# Altium PCB ArduinoUnoShield.PcbDoc
Units mil, origin at the board's own origin, x right, y up, seen from the top; angles counter-clockwise.
Board outline 2700 x 2100 mil, 2 copper layers (Top Layer, Bottom Layer); 5 components, 32 nets, 42 pads, 0 vias.
Unrouted connection lines stored in the file: 5.
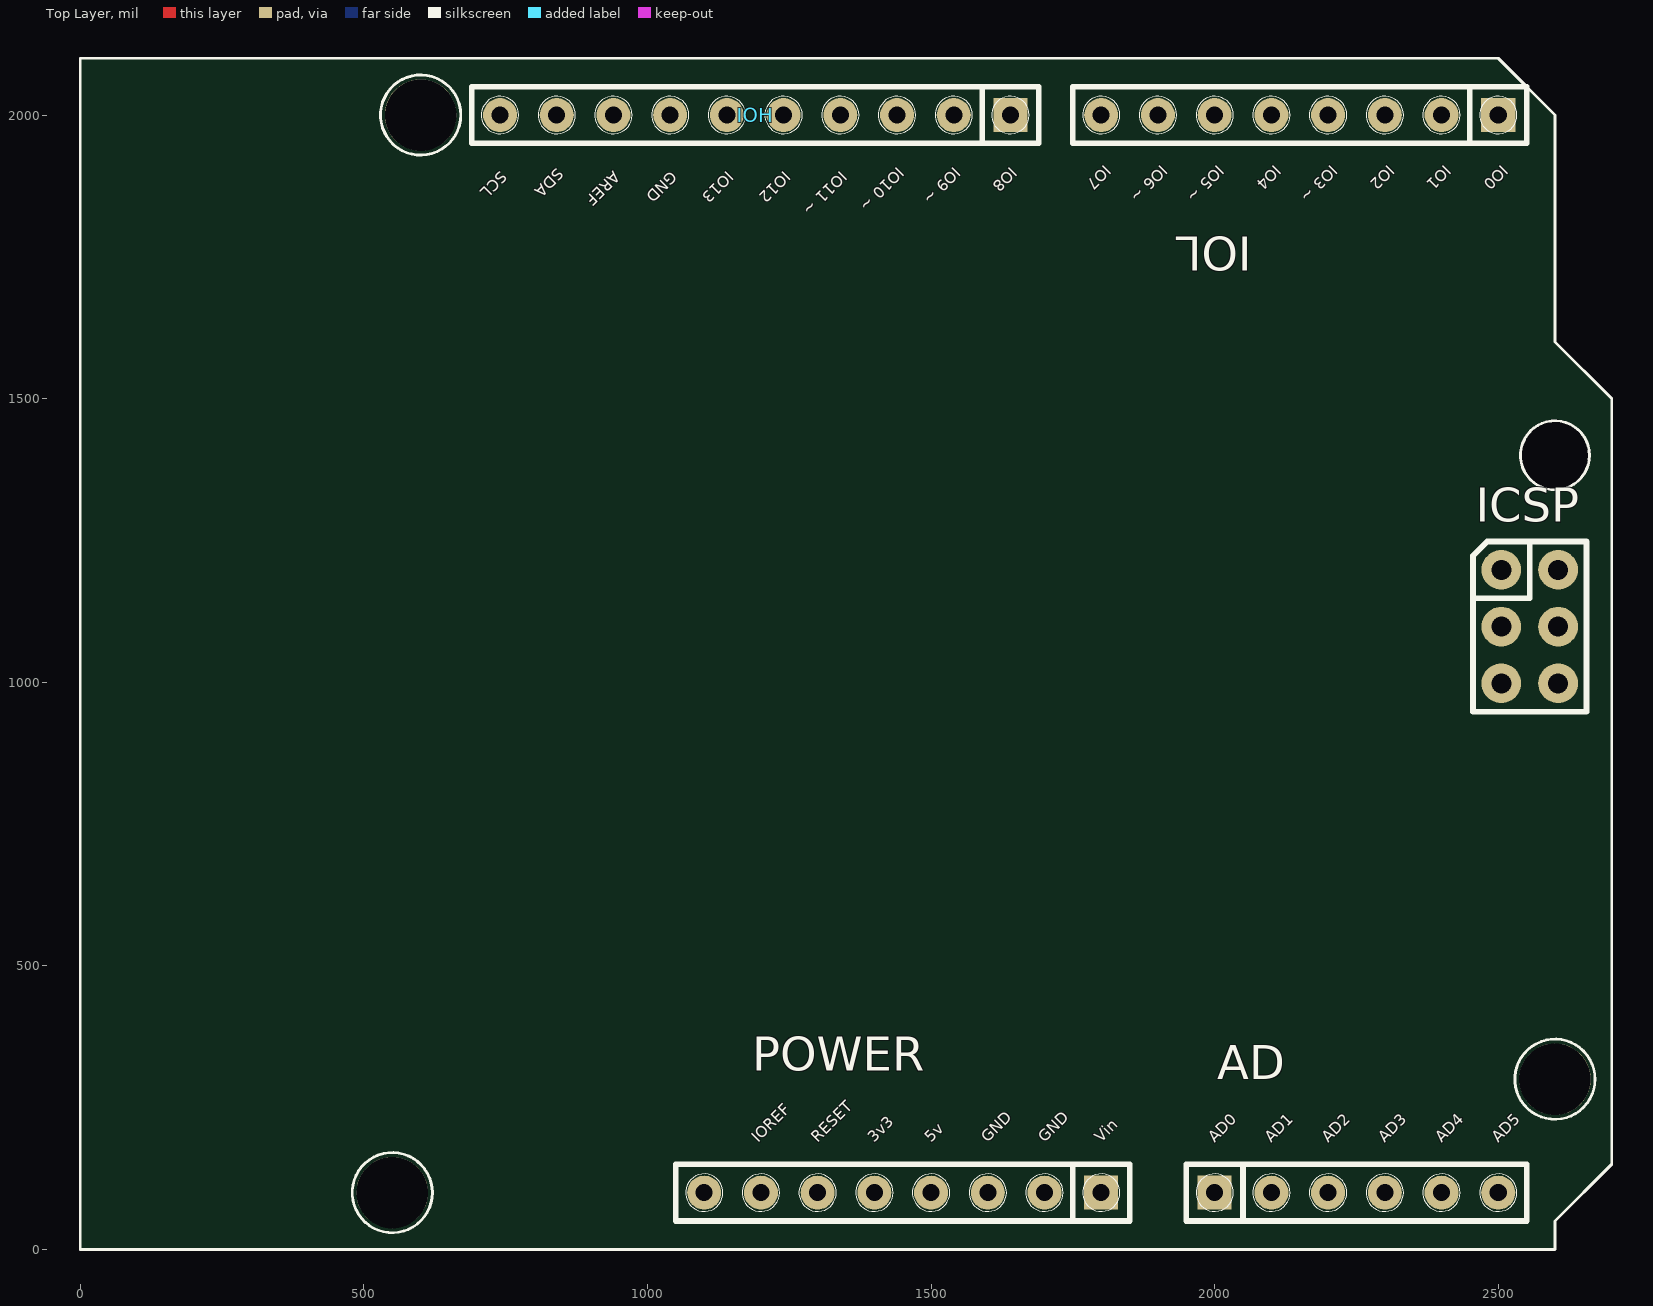
[diagram p0: Top Layer view]
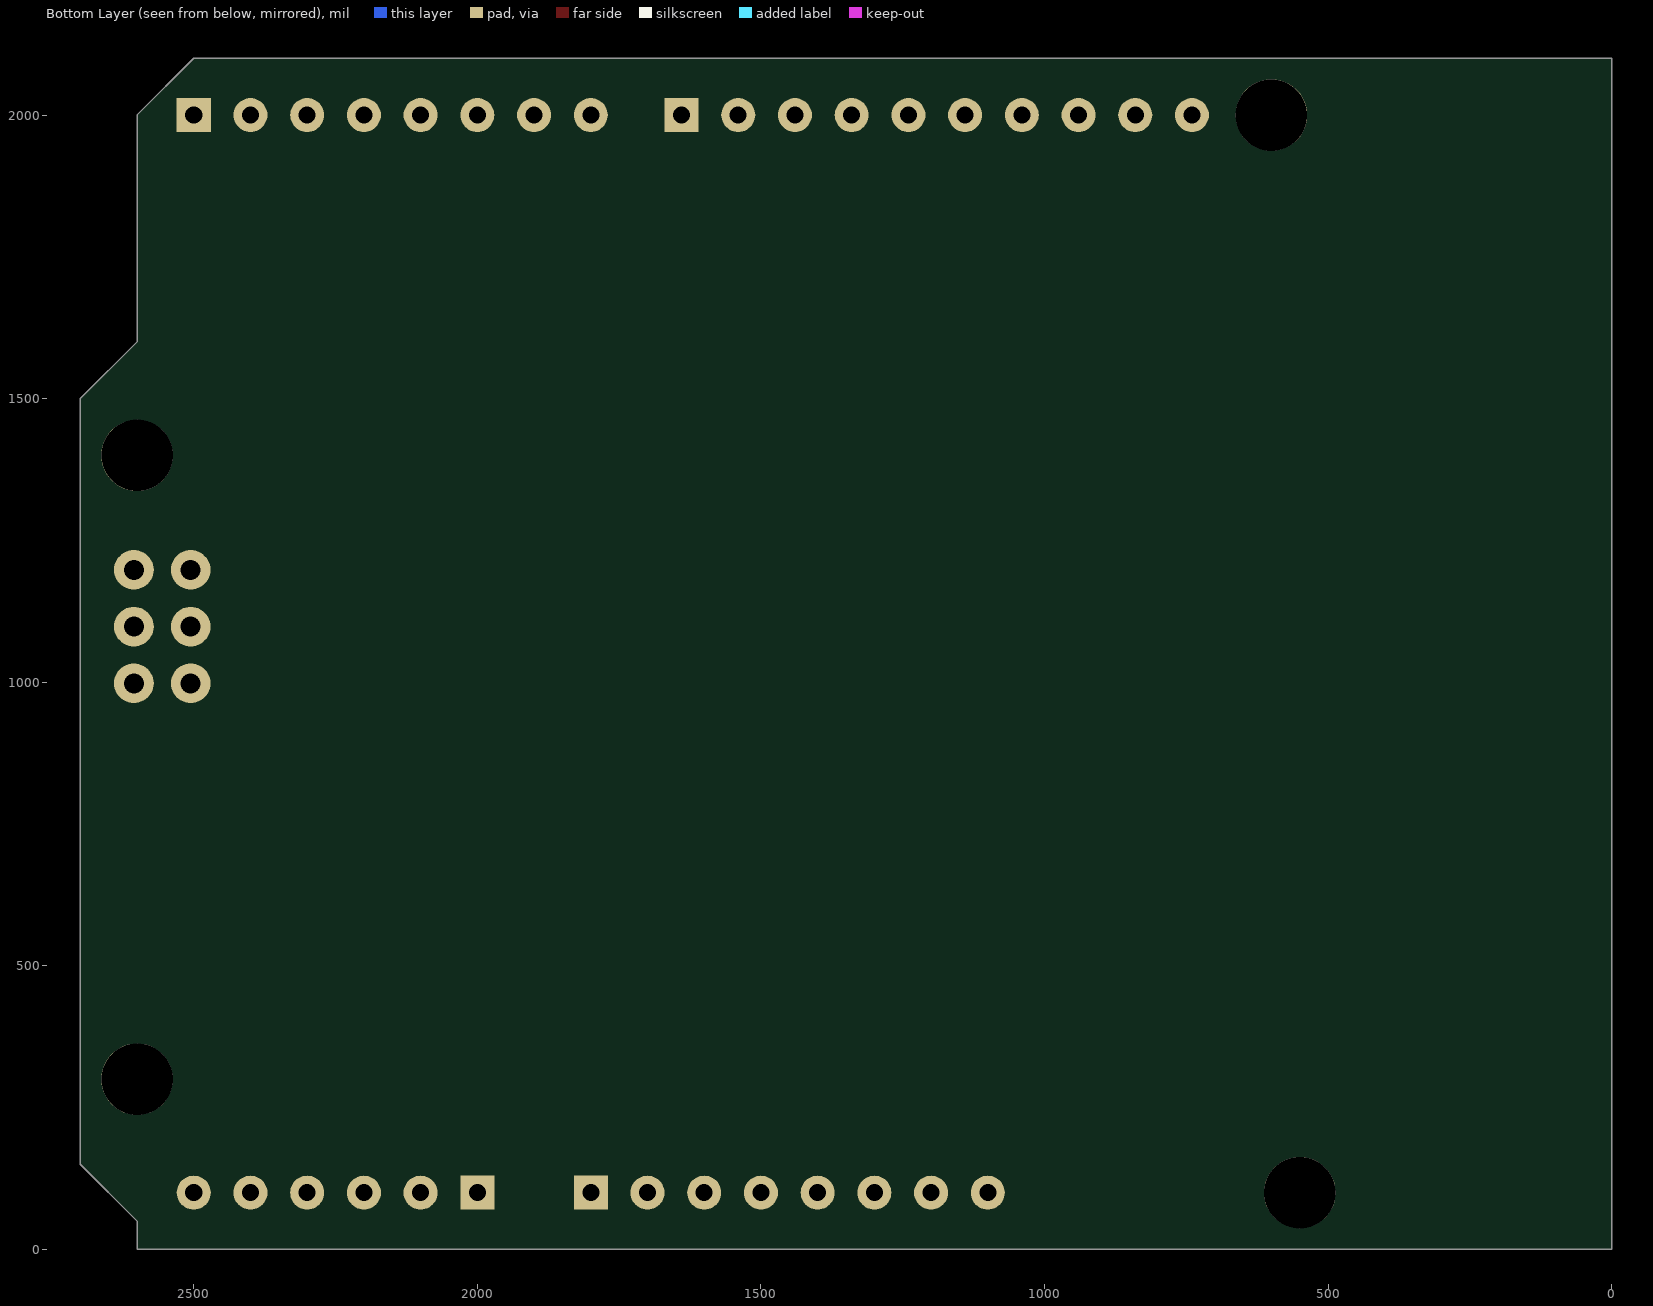
[diagram p1: Bottom Layer view, seen from below]

## Layer stack, top to bottom
Top Solder: solder mask 0.4, Solder Resist, Dk 3.5
Top Layer: signal copper 1.4
Dielectric1: dielectric 12.6, FR-4, Dk 4.8
Bottom Layer: signal copper 1.4
Bottom Solder: solder mask 0.4, Solder Resist, Dk 3.5

## Board outline
0,0 0,2100 2500,2100 2600,2000 2600,1600 2700,1500 2700,150 2600,50 2600,0

## Design rules (kind name [scope] priority, off if disabled: settings)
Clearance [All] p1: gap=10 ignorepadtopadclearanceinfootprint=FALSE except(0: Arc-Hole Track-Hole SMDPad-Hole THPad-Hole Via-Hole Fill-Hole Poly-Hole Region-Hole Text-Hole)
PolygonConnect [All] p1: connectstyle=Relief reliefconductorwidth=10 reliefentries=4 polygonreliefangle="90 Angle" airgapwidth=10
RoomDefinition ArduinoUnoShield [InComponentClass('ArduinoUnoShield')] p1: confinementstyle=ConfineOut formatcopy=TRUE lockcomponents=FALSE outline 2900,-40 3490,-40 3490,425 2900,425
RoutingVias [All] p1: holewidth=28 width=50 viastyle="Through Hole" minholewidth=28 minwidth=50 maxholewidth=28 maxwidth=50
SilkToSolderMaskClearance SilkscreenOverComponentPads [IsPad] p1: minsilkscreentomaskgap=10 clearancetoexposedcopper=TRUE
SolderMaskExpansion [All] p1: expansion=4
Width [All] p1: maxlimit=10 minlimit=10 preferedwidth=10
29 further rules are at their usual default settings.

## Components (designator, comment, footprint, x,y, rotation, side; value= is the part's Value field where it differs from the comment)
AD "AD" "Header 6x1 8.5mm" 2000,100 r0 top locked
ICSP "ICSP" ICSP 2505.51,1198.03 r0 top locked
IOH "IOH" "Header 10x1 8.5mm" 1640,2000 r180 top locked
IOL "IOL" "Header 8x1 8.5mm" 2500,2000 r180 top locked
POWER "POWER_UNO" "Header 8x1 8.5mm" 1800,100 r180 top locked

## Footprints (in the part's own frame and the unit in brackets; to place one, negate y for a bottom-side part, rotate by r counter-clockwise, add the part's x,y. Pads: shape width x height; smd on the part's side, far side on the other; paste and mask are expansions set on the pad)
"Header 6x1 8.5mm" [mil] "Stackable 6 pin header"
  rect 60x60 hole 30: 1(0,0)
  round 60 hole 30: 2(100,0) 3(200,0) 4(300,0) 5(400,0) 6(500,0)
  silkscreen extent -50,-50 550,50, body extent -50,-50 550,50, height 335
"Header 8x1 8.5mm" [mil] "Stackable 8 pin header"
  rect 60x60 hole 30: 1(0,0)
  round 60 hole 30: 2(100,0) 3(200,0) 4(300,0) 5(400,0) 6(500,0) 7(600,0) 8(700,0)
  silkscreen extent -50,-50 750,50, body extent -50,-50 750,50, height 335
"Header 10x1 8.5mm" [mil] "Stackable 10 pin header"
  rect 60x60 hole 30: 1(0,0)
  round 60 hole 30: 2(100,0) 3(200,0) 4(300,0) 5(400,0) 6(500,0) 7(600,0) 8(700,0) 9(800,0) 10(900,0)
  silkscreen extent -50,-50 950,50, body extent -50,-50 950,50, height 335
ICSP [mil]
  round 70 hole 35.43: 1(0,0) 2(100,0) 3(0,-100) 4(100,-100) 5(0,-200) 6(100,-200)
  silkscreen extent -50,-250 150,50, body extent -50,-250 150,50, height 485

## Free pads (board coordinates)
  round 125.98 hole 125.98: 0(550,100) 0(600,2000) 0(2600,300) 0(2600,1400)

## Nets (pads, with @x,y where several pads share a name; then routed paths per layer and width w, separated by ;. In a path a pad name is that pad's centre, name@x,y a point inside that pad or via, vN(x,y) a via of type N, cw(c..) or ccw(c..) an arc to the next point about the centre after c; other vN are vias at no path point)
3V3: POWER.5
5V: ICSP.2 POWER.4
AD0: AD.1
AD1: AD.2
AD2: AD.3
AD3: AD.4
AD4: AD.5
AD5: AD.6
AREF: IOH.8
GND: ICSP.6 IOH.7 POWER.2 POWER.3
IO0: IOL.1
IO1: IOL.2
IO2: IOL.3
IO3: IOL.4
IO4: IOL.5
IO5: IOL.6
IO6: IOL.7
IO7: IOL.8
IO8: IOH.1
IO9: IOH.2
IO10: IOH.3
IO11: IOH.4
IO12: IOH.5
IO13: IOH.6
IOREF: POWER.7
MISO: ICSP.1
MOSI: ICSP.4
RESET: ICSP.5 POWER.6
SCK: ICSP.3
SCL: IOH.10
SDA: IOH.9
VIN: POWER.1
pads on no net: POWER.8

## Silkscreen, mask and mechanical layers (free items; w line width, h text height)
Top Overlay:
  circle w1: c1100,100 r33
  circle w1: c1200,100 r33
  circle w1: c1300,100 r33
  circle w1: c1400,100 r33
  circle w1: c1500,100 r33
  circle w1: c1600,100 r33
  circle w1: c1700,100 r33
  circle w1: c1800,100 r33
  circle w1: c2000,100 r33
  circle w1: c2100,100 r33
  circle w1: c2200,100 r33
  circle w1: c2300,100 r33
  circle w1: c2400,100 r33
  circle w1: c2500,100 r33
  circle w1: c2500,2000 r33
  circle w1: c2400,2000 r33
  circle w1: c2300,2000 r33
  circle w1: c2200,2000 r33
  circle w1: c2100,2000 r33
  circle w1: c2000,2000 r33
  circle w1: c1900,2000 r33
  circle w1: c1640,2000 r33
  circle w1: c1800,2000 r33
  circle w1: c1540,2000 r33
  circle w1: c1440,2000 r33
  circle w1: c1340,2000 r33
  circle w1: c1240,2000 r33
  circle w1: c1140,2000 r33
  circle w1: c1040,2000 r33
  circle w1: c940,2000 r33
  circle w1: c840,2000 r33
  circle w1: c740,2000 r33
  circle w5: c600,2000 r70.71
  circle w5: c550,100 r70.71
  circle w5: c2600,300 r70.71
  circle w5: c2600,1400 r60.88
  lines w5: 0,0 0,2100 2500,2100 2600,2000 2600,1600 2700,1500 2700,150 2600,50 2600,0 0,0
  text "IO7" at 1805,1912.93 h20 r225
  text "IO6 ~" at 1905,1912.93 h20 r225
  text "IO5 ~" at 2005,1912.93 h20 r225
  text "IO4" at 2105,1912.93 h20 r225
  text "IO3 ~" at 2205,1912.93 h20 r225
  text "IO2" at 2305,1912.93 h20 r225
  text "IO1" at 2405,1912.93 h20 r225
  text "IO0" at 2505,1912.93 h20 r225
  text "IO10 ~" at 1440,1910 h20 r225
  text "IO9 ~" at 1540,1910 h20 r225
  text "IO8" at 1640,1910 h20 r225
  text "SDA" at 840,1907.93 h20 r225
  text "SCL" at 740,1902.93 h20 r225
  text "AREF" at 940,1902.93 h20 r225
  text "GND" at 1040,1902.93 h20 r225
  text "IO13" at 1140,1902.93 h20 r225
  text "IO12" at 1240,1902.93 h20 r225
  text "IO11 ~" at 1340,1902.93 h20 r225
  text "IOREF" at 1195,187.07 h20 r45
  text "RESET" at 1300,187.07 h20 r45
  text "3v3" at 1400,187.07 h20 r45
  text "5v" at 1500,187.07 h20 r45
  text "GND" at 1600,187.07 h20 r45
  text "GND" at 1700,187.07 h20 r45
  text "Vin" at 1800,187.07 h20 r45
  text "AD0" at 2000,187.07 h20 r45
  text "AD1" at 2100,187.07 h20 r45
  text "AD2" at 2200,187.07 h20 r45
  text "AD3" at 2300,187.07 h20 r45
  text "AD4" at 2400,187.07 h20 r45
  text "AD5" at 2500,187.07 h20 r45
  text "RESET" at 1295,-2515 h20 r45
  text "3v3" at 1395,-2515 h20 r45
  text "5v" at 1495,-2515 h20 r45
  text "GND" at 1595,-2515 h20 r45
  text "GND" at 1695,-2515 h20 r45
  text "Vin" at 1795,-2515 h20 r45
Mechanical 1:
  circle w5: c600,2000 r62.99
  circle w5: c2600,300 r62.99
  circle w5: c550,100 r62.99
  circle w5: c2600,1400 r62.99
  lines w5: 0,0 0,2100 2500,2100 2600,2000 2600,1600 2700,1500 2700,150 2600,50 2600,0 0,0